# EAGLE board CT_schematic (EAGLE 7.6.0)

Size 100 x 80 mm. Coordinates in mm from the lower left corner, seen from the top.
Outline: 0,0 100,0 100,80 0,80 0,0
Copper layers (1*16): Top 0.035mm / dielectric 1.5mm / Bottom 0.035mm
Design rules "default": minimum track width 10mil, minimum drill 24mil, track to track 8mil, track to pad 8mil, pad to pad 8mil, via to via 8mil, smd to smd 8mil, copper to edge 40mil, drill to drill 8mil, minimum pad ring 10mil, minimum via ring 8mil, stop-mask expansion 4mil, vias tented up to drill 0mil, thermal gap 10mil

## Footprints (pad centres in the part's own frame; a part is rotated, then mirrored left to right if it is on the bottom)
C0603 = smd 0.8 x 0.8: 1 -0.762,0; 2 0.762,0
C0402 = smd 0.5 x 0.5: 1 -0.508,0; 2 0.508,0
C1210 = smd 1.2 x 2.5: 1 -1.524,0; 2 1.524,0
R0603 = smd 0.8 x 0.8: 1 -0.762,0; 2 0.762,0
EXV-9H = smd 3.505 x 1.676: 1 -2.857,0; 2 2.857,0
L0603 = smd 0.8 x 0.8: 1 -0.762,0; 2 0.762,0
IND25X25CZ = smd 2.489 x 3.429: 1 -2.718,0; 2 2.718,0
PJ-037B_PACKAGE = drill 3.7 square: 1 12,0 | drill 3.2 square: 2 6,0
LQFP64 = smd 0.3 x 1.2: 1 -3.75,-5.75; 2 -3.25,-5.75; 3 -2.75,-5.75; 4 -2.25,-5.75; 5 -1.75,-5.75; 6 -1.25,-5.75; 7 -0.75,-5.75; 8 -0.25,-5.75; 9 0.25,-5.75; 10 0.75,-5.75; 11 1.25,-5.75; 12 1.75,-5.75; 13 2.25,-5.75; 14 2.75,-5.75; 15 3.25,-5.75; 16 3.75,-5.75; 33 3.75,5.75; 34 3.25,5.75; 35 2.75,5.75; 36 2.25,5.75; 37 1.75,5.75; 38 1.25,5.75; 39 0.75,5.75; 40 0.25,5.75; 41 -0.25,5.75; 42 -0.75,5.75; 43 -1.25,5.75; 44 -1.75,5.75; 45 -2.25,5.75; 46 -2.75,5.75; 47 -3.25,5.75; 48 -3.75,5.75 | smd 1.2 x 0.3: 17 5.75,-3.75; 18 5.75,-3.25; 19 5.75,-2.75; 20 5.75,-2.25; 21 5.75,-1.75; 22 5.75,-1.25; 23 5.75,-0.75; 24 5.75,-0.25; 25 5.75,0.25; 26 5.75,0.75; 27 5.75,1.25; 28 5.75,1.75; 29 5.75,2.25; 30 5.75,2.75; 31 5.75,3.25; 32 5.75,3.75; 49 -5.75,3.75; 50 -5.75,3.25; 51 -5.75,2.75; 52 -5.75,2.25; 53 -5.75,1.75; 54 -5.75,1.25; 55 -5.75,0.75; 56 -5.75,0.25; 57 -5.75,-0.25; 58 -5.75,-0.75; 59 -5.75,-1.25; 60 -5.75,-1.75; 61 -5.75,-2.25; 62 -5.75,-2.75; 63 -5.75,-3.25; 64 -5.75,-3.75
TDFN-8/6MM = smd 0.3 x 0.75: 1 0,0; 2 0.5,0; 3 1,0; 4 1.5,0; 5 1.5,3; 6 1,3; 7 0.5,3; 8 0,3
DFN8-S = smd 0.6 x 0.4: 1 -2.69,1.905; 2 -2.69,0.635; 3 -2.69,-0.635; 4 -2.69,-1.905; 5 2.69,-1.905; 6 2.69,-0.635; 7 2.69,0.635; 8 2.69,1.905
RFM75-S = smd 0.85 x 1.6: 1 1.7,0.8; 2 2.97,0.8; 3 4.24,0.8; 4 5.51,0.8; 5 6.78,0.8; 6 8.05,0.8; 7 9.32,0.8; 8 10.59,0.8
ABS07-32.768KHZ-7-T = smd 1.1 x 2.4: 1 -2.5,0; 2 0,0
ABLS-25.000MHZ-B2F-T = smd 5.6 x 2.8: 1 -3.81,0; 2 5.69,0
IR3899MTR1PBF = smd 0.25 x 0.75: 1 0,0; 2 0.5,0; 3 1,0; 4 1.5,0; 5 2,0; 6 2.5,0; 7 3,0 | smd 0.75 x 0.25: 8 3.425,0.78; 9 3.425,1.28; 10 3.425,1.78; 14 -0.425,1.78; 15 -0.425,1.28; 16 -0.425,0.78 | smd 0.3 x 1.95: 11 3.22,3.63 | smd 1.62 x 2.42: 12 1.786,3.8 | smd 1 x 1.95: 13 0.117,3.63 | smd 2.19 x 1.25: 17 1.51,1.26
SON-6 = smd 0.55 x 0.3: 1 -0.355,0.5 | smd 0.52 x 0.3: 2 -0.37,0; 3 -0.37,-0.5; 4 0.37,-0.5; 5 0.37,0; 6 0.37,0.5
SW_4-1437565-2 = smd 1.4 x 2.1: 1 -2.23,4.55; 2 -2.23,-4.55; 3 2.23,4.55; 4 2.23,-4.55
LGM67K-G1J2-24-Z = smd 0.8 x 1.4: A -2,0; C 0,0
NC7SZ125M5X = smd 1.3 x 0.7: 1 -1.3,0.95; 2 -1.3,0; 3 -1.3,-0.95; 4 1.3,-0.95; 5 1.3,0.95
DUMMY_PACKAGE_138 = drill 0.3: 1 0,-1; 2 1.5,-1; 3 3,-1

## Placement (x,y rotation side)
C1  1e-06  [C0603]  -22.86,66.04 0 top  (outside the outline)
C2  1e-07  [C0603]  -26.67,66.04 0 top  (outside the outline)
C3  1e-07  [C0603]  -30.48,66.04 0 top  (outside the outline)
C4  1e-07  [C0603]  -34.29,66.04 0 top  (outside the outline)
C5  1e-07  [C0603]  -38.1,66.04 0 top  (outside the outline)
C6  1e-07  [C0603]  -41.91,66.04 0 top  (outside the outline)
C7  4.7e-06  [C0603]  -64.77,60.96 0 top  (outside the outline)
C8  2.2e-06  [C0603]  -68.58,60.96 0 top  (outside the outline)
C9  2.2e-06  [C0603]  -15.24,66.04 0 top  (outside the outline)
C10  1e-08  [C0603]  -45.72,66.04 0 top  (outside the outline)
C11  1e-06  [C0603]  -49.53,66.04 0 top  (outside the outline)
C12  1e-11  [C0402]  -39.37,71.12 0 top  (outside the outline)
C13  1e-11  [C0402]  -43.18,71.12 0 top  (outside the outline)
C14  1e-11  [C0402]  -46.99,71.12 0 top  (outside the outline)
C15  1e-11  [C0402]  -50.8,71.12 0 top  (outside the outline)
C16  1e-08  [C0402]  -54.61,71.12 0 top  (outside the outline)
C17  1e-08  [C0402]  -58.42,71.12 0 top  (outside the outline)
C18  1e-07  [C0402]  -62.23,71.12 0 top  (outside the outline)
C19  1e-06  [C0603]  -53.34,66.04 0 top  (outside the outline)
C20  0.0001  [C1210]  -57.15,48.26 0 top  (outside the outline)
C21  2.2e-06  [C0603]  -19.05,66.04 0 top  (outside the outline)
C22  1e-07  [C0402]  -66.04,71.12 0 top  (outside the outline)
C23  1e-07  [C0402]  -15.24,76.2 0 top  (outside the outline)
C24  8.2e-09  [C0402]  -35.56,71.12 0 top  (outside the outline)
C25  2.7074646757046e-07  [R0603]  -20.32,55.88 0 top  (outside the outline)
C28  1e-07  [C0402]  -19.05,76.2 0 top  (outside the outline)
C29  0.0001  [EXV-9H]  -33.02,39.37 0 top  (outside the outline)
C30  0.0001  [EXV-9H]  -44.45,39.37 0 top  (outside the outline)
C31  1e-08  [C0402]  -22.86,76.2 0 top  (outside the outline)
F1  240.0  [L0603]  -57.15,66.04 0 top  (outside the outline)
I1  6.8e-07  [IND25X25CZ]  -17.78,49.53 0 top  (outside the outline)
J1  PJ-037B  [PJ-037B_PACKAGE]  -43.18,7.62 0 top  (outside the outline)
R2  1000.0  [R0603]  -60.96,66.04 0 top  (outside the outline)
R4  4700.0  [R0603]  -64.77,66.04 0 top  (outside the outline)
R5  2200.0  [R0603]  -68.58,66.04 0 top  (outside the outline)
R6  2200.0  [R0603]  -15.24,71.12 0 top  (outside the outline)
R7  2200.0  [R0603]  -19.05,71.12 0 top  (outside the outline)
R8  2200.0  [R0603]  -22.86,71.12 0 top  (outside the outline)
R9  10000.0  [R0603]  -66.04,55.88 0 top  (outside the outline)
R10  10000.0  [R0603]  -15.24,60.96 0 top  (outside the outline)
R11  10000.0  [R0603]  -20.32,60.96 0 top  (outside the outline)
R12  10000.0  [R0603]  -25.4,60.96 0 top  (outside the outline)
R13  10000.0  [R0603]  -30.48,60.96 0 top  (outside the outline)
R14  10000.0  [R0603]  -35.56,60.96 0 top  (outside the outline)
R15  0.1  [R0603]  -26.67,71.12 0 top  (outside the outline)
R16  4030.2416170974  [R0603]  -27.94,55.88 0 top  (outside the outline)
R17  1007.5604042744  [R0603]  -35.56,55.88 0 top  (outside the outline)
R18  64.186993865031  [R0603]  -43.18,55.88 0 top  (outside the outline)
R19  130.0  [R0603]  -30.48,71.12 0 top  (outside the outline)
R20  39000.0  [R0603]  -40.64,60.96 0 top  (outside the outline)
R21  49900.0  [R0603]  -45.72,60.96 0 top  (outside the outline)
R22  5322.6666666667  [R0603]  -50.8,55.88 0 top  (outside the outline)
R23  10000.0  [R0603]  -50.8,60.96 0 top  (outside the outline)
R24  10000.0  [R0603]  -55.88,60.96 0 top  (outside the outline)
R25  18000.0  [R0603]  -60.96,60.96 0 top  (outside the outline)
R26  470000.0  [R0603]  -55.88,55.88 0 top  (outside the outline)
R27  120000.0  [R0603]  -60.96,55.88 0 top  (outside the outline)
U1  STM32F415RGT6  [LQFP64]  -55.88,7.62 0 top  (outside the outline)
U2  24AA00T-I/MNY  [TDFN-8/6MM]  -24.13,39.37 0 top  (outside the outline)
U3  24AA256-I/MF  [DFN8-S]  -57.15,29.21 0 top  (outside the outline)
U4  RFM75-S  [RFM75-S]  -26.67,3.81 0 top  (outside the outline)
U5  ABS07-32.768KHZ-7-T  [ABS07-32.768KHZ-7-T]  -36.83,49.53 0 top  (outside the outline)
U6  ABLS-25.000MHZ-B2F-T  [ABLS-25.000MHZ-B2F-T]  -63.5,39.37 0 top  (outside the outline)
U7  IR3899MTR1PBF  [IR3899MTR1PBF]  -44.45,26.67 0 top  (outside the outline)
U8  TPS3895ADRYR  [SON-6]  -31.75,74.93 0 top  (outside the outline)
U9  4-1437565-2  [SW_4-1437565-2]  -27.94,29.21 0 top  (outside the outline)
U10  Q65110A2395  [LGM67K-G1J2-24-Z]  -45.72,48.26 0 top  (outside the outline)
U11  nc7sz125m5x  [NC7SZ125M5X]  -62.23,46.99 0 top  (outside the outline)
U12  Dummy  [DUMMY_PACKAGE_138]  -29.21,76.2 0 top  (outside the outline)

## Library data of the parts
C1-C25 C28-C31 F1 I1 J1 R2 R4-R27 U1-U12 = circuit_tree

## Nets
CLK_CRYSTAL_U1_3: C12.1 U1.3 U5.1
CLK_CRYSTAL_U1_4: C13.1 U1.4 U5.2
CLK_CRYSTAL_U1_5: C14.1 U1.5 U6.1
CLK_CRYSTAL_U1_6: C15.1 U1.6 U6.2
GND: C1.2 C2.2 C3.2 C4.2 C5.2 C6.2 C7.2 C8.2 C9.2 C10.2 C11.2 C12.2 C13.2 C14.2 C15.2 C16.2 C17.2 C18.2 C19.2 C21.2 C22.2 C23.2 C28.2 C29.2 C30.2 C31.2 J1.2 R2.2 R9.2 R11.2 R12.2 R15.1 R15.2 R17.2 R20.2 R22.2 R25.2 R27.2 U1.12 U1.18 U1.63 U2.4 U3.4 U4.1 U7.4 U7.11 U7.17 U8.2 U10.C U11.1 U11.3 U12.1
NET_U1_7: R4.1 U1.7 U11.4
NET_U1_13: C10.1 C11.1 F1.1 U1.13
NET_U1_29: R7.1 U1.29 U2.6
NET_U1_30: R8.1 U1.30 U2.5
NET_U1_31: C8.1 U1.31
NET_U1_47: C9.1 U1.47
NET_U1_58: R5.1 U1.58 U3.6
NET_U1_59: R6.1 U1.59 U3.5
NET_U1_60: R9.1 U1.60
NET_U1_61: U10.A
NET_U1_62: U9.3 U9.4
NET_U3_1: R10.1 U3.1
NET_U3_2: R11.1 U3.2
NET_U3_3: R12.1 U3.3
NET_U4_3: R13.1 U4.3
NET_U7_1: C24.1 R16.1 R17.1 R18.1 R19.1 U7.1 U7.8
NET_U7_2: C23.1 U7.2
NET_U7_3: C24.2 C25.1 C25.2 U7.3
NET_U7_5: R20.1 U7.5
NET_U7_10: C21.1 U7.10
NET_U7_12: C20.1 I1.1 U7.12
NET_U7_13: U7.13
NET_U7_14: C20.2 U7.14
NET_U7_15: R21.1 R22.1 U7.15
NET_U7_ATNET_3: I1.2 R16.2
NET_U7_ATNET_4: C25.2 R18.2
NET_U7_ATNET_5: R19.2
NET_U8_1: R24.1 R25.1 U8.1
NET_U8_3: R26.2 R27.1 U8.3
NET_U8_4: R23.1 U8.4 U11.2
NET_U9_1: R2.1 U9.1 U9.2
PROC_SPI1_MISO: U1.22 U4.7
PROC_SPI1_MOSI: U1.23 U4.6
PROC_SPI1_NSS: R14.1 U1.20 U4.4
PROC_SPI1_SCK: U1.21 U4.5
PROC_TIM1_CH2: U1.42 U12.2
PROC_TIM1_CH4: U1.44 U12.3
VCC_S1_16V3: C22.1 C29.1 C30.1 J1.1 R21.2 U7.9
VCC_TIER1_2V5: C1.1 C2.1 C3.1 C4.1 C5.1 C6.1 C7.1 C16.1 C17.1 C18.1 C19.1 C28.1 C31.1 F1.2 I1.2 R4.2 R5.2 R6.2 R7.2 R8.2 R10.2 R13.2 R14.2 R16.2 R23.2 R24.2 R26.1 U1.1 U1.19 U1.32 U1.48 U1.64 U2.8 U3.7 U3.8 U4.2 U8.6 U11.5

## Tracks (layer width: path | path; a pad name or v marks a point on that pad's centre or on a via)
CLK_CRYSTAL_U1_3  (2 unrouted)
CLK_CRYSTAL_U1_4  (2 unrouted)
CLK_CRYSTAL_U1_5  (2 unrouted)
CLK_CRYSTAL_U1_6  (2 unrouted)
GND  (51 unrouted)
NET_U1_7  (2 unrouted)
NET_U1_13  (3 unrouted)
NET_U1_29  (2 unrouted)
NET_U1_30  (2 unrouted)
NET_U1_31  (1 unrouted)
NET_U1_47  (1 unrouted)
NET_U1_58  (2 unrouted)
NET_U1_59  (2 unrouted)
NET_U1_60  (1 unrouted)
NET_U1_62  (1 unrouted)
NET_U3_1  (1 unrouted)
NET_U3_2  (1 unrouted)
NET_U3_3  (1 unrouted)
NET_U4_3  (1 unrouted)
NET_U7_1  (6 unrouted)
NET_U7_2  (1 unrouted)
NET_U7_3  (3 unrouted)
NET_U7_5  (1 unrouted)
NET_U7_10  (1 unrouted)
NET_U7_12  (2 unrouted)
NET_U7_14  (1 unrouted)
NET_U7_15  (2 unrouted)
NET_U7_ATNET_3  (1 unrouted)
NET_U7_ATNET_4  (1 unrouted)
NET_U8_1  (2 unrouted)
NET_U8_3  (2 unrouted)
NET_U8_4  (2 unrouted)
NET_U9_1  (2 unrouted)
PROC_SPI1_MISO  (1 unrouted)
PROC_SPI1_MOSI  (1 unrouted)
PROC_SPI1_NSS  (2 unrouted)
PROC_SPI1_SCK  (1 unrouted)
PROC_TIM1_CH2  (1 unrouted)
PROC_TIM1_CH4  (1 unrouted)
VCC_S1_16V3  (5 unrouted)
VCC_TIER1_2V5  (37 unrouted)